# Altium PCB oldman.PcbDoc
Units mil, origin at the board's own origin, x right, y up, seen from the top; angles counter-clockwise.
Board outline 1980.65 x 3160.35 mil, 2 copper layers (Top Layer, Bottom Layer); 19 components, 19 nets, 146 pads, 92 vias.
Unrouted connection lines stored in the file: 1.
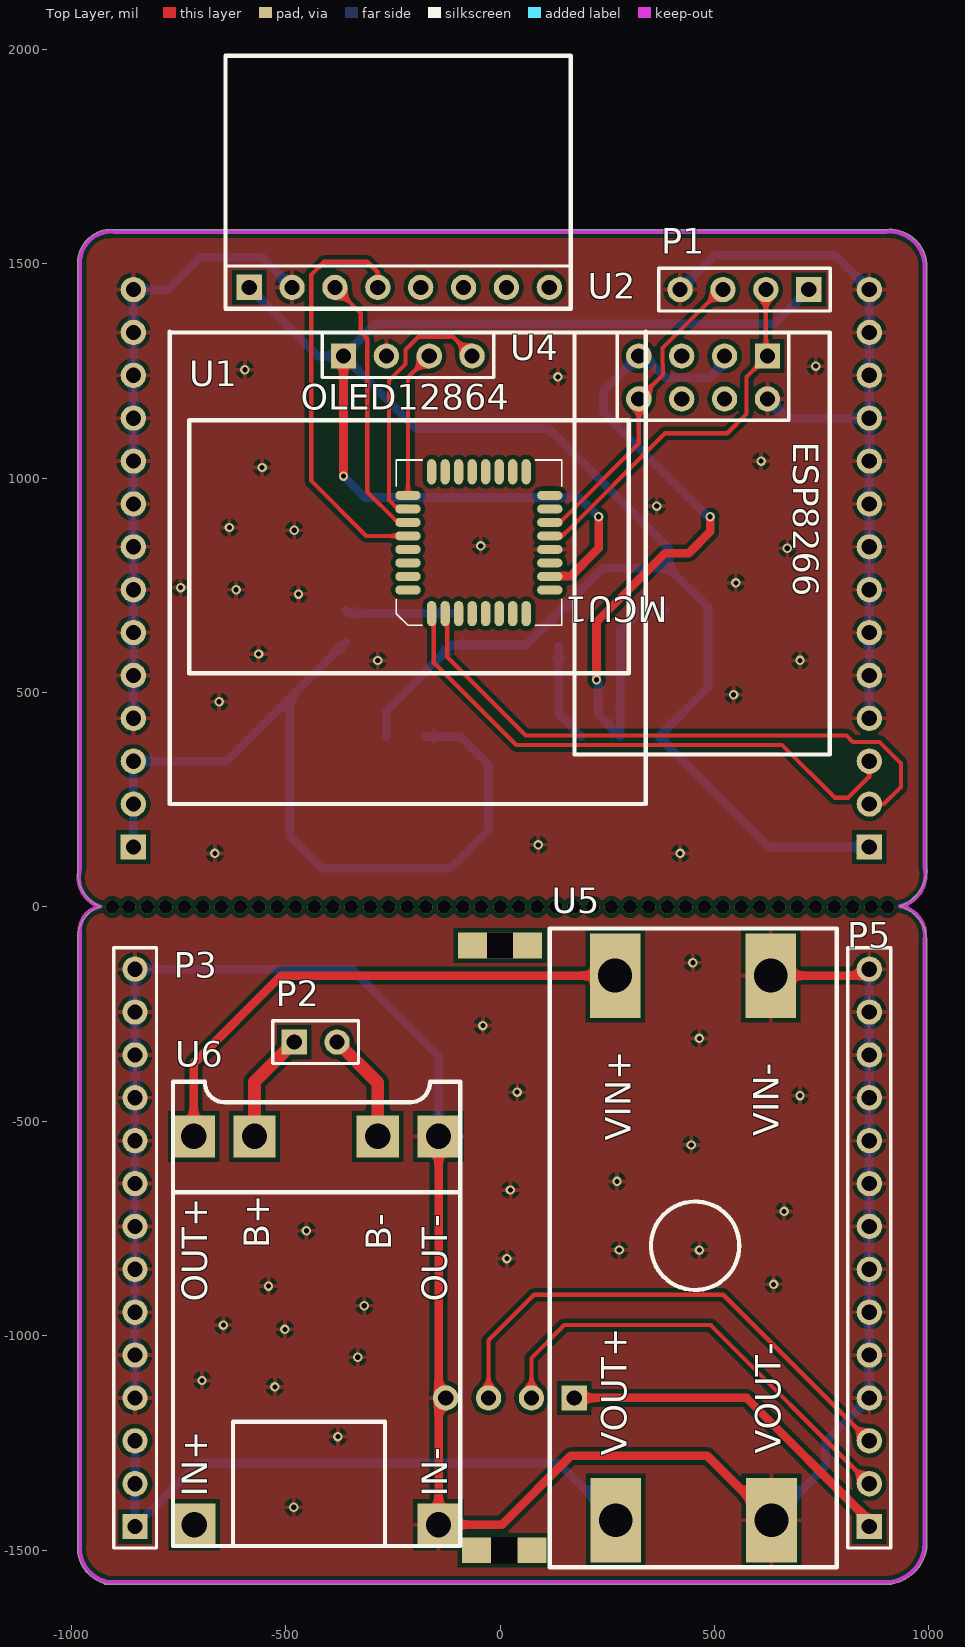
[diagram p0: Top Layer view]
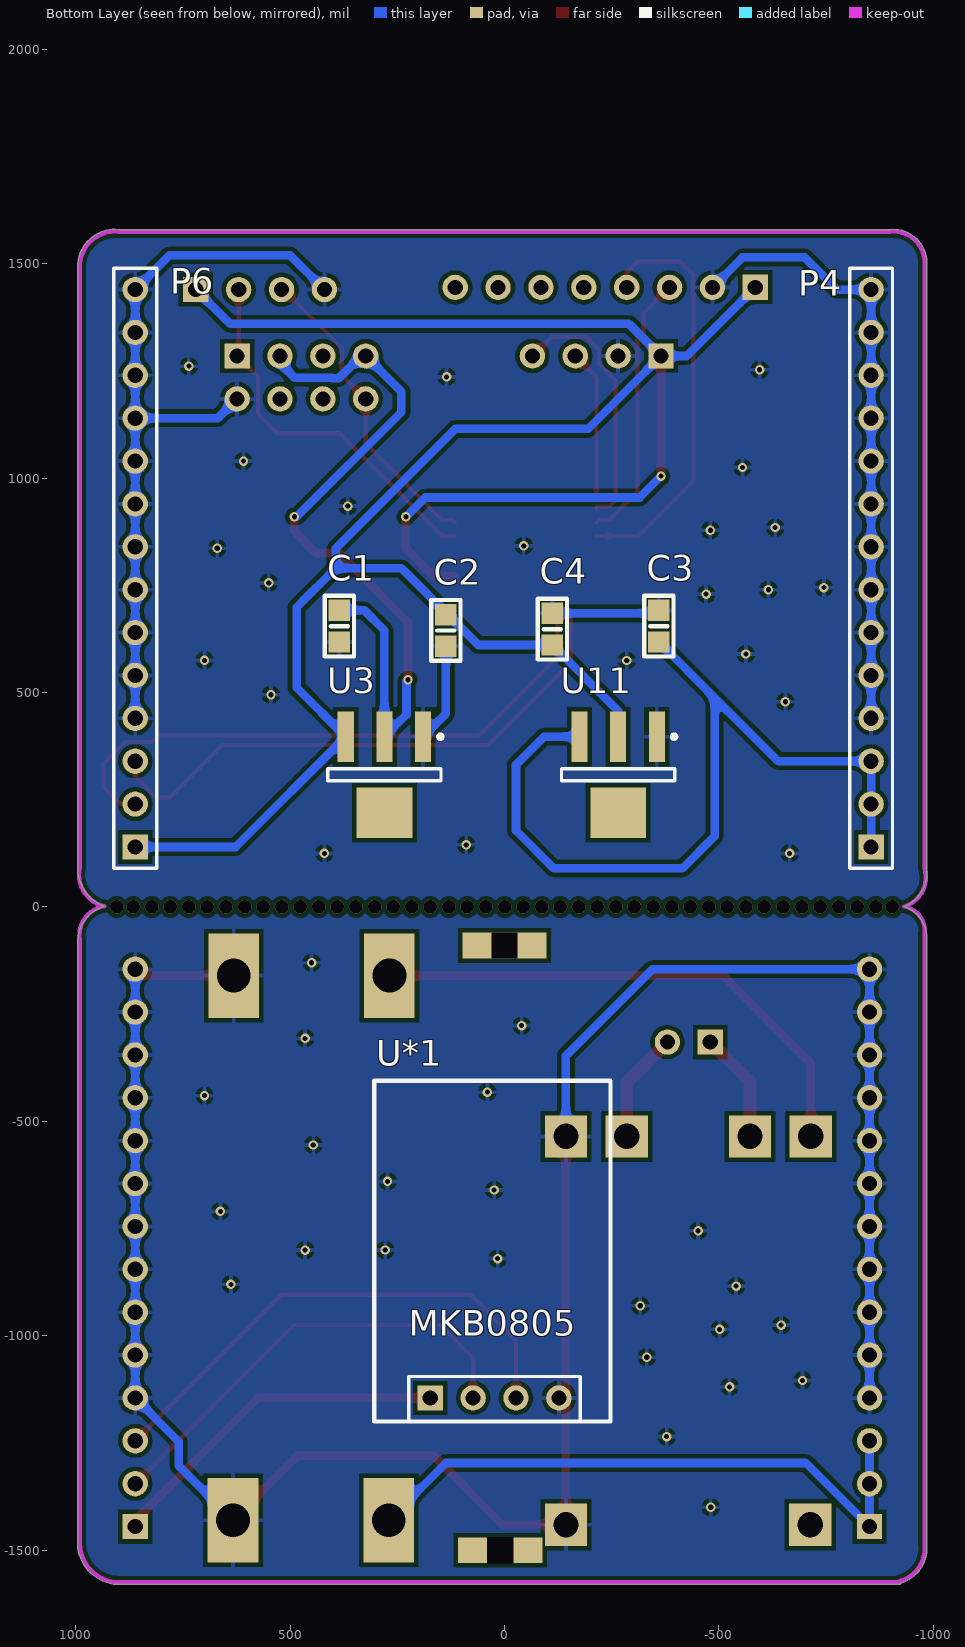
[diagram p1: Bottom Layer view, seen from below]

## Layer stack, top to bottom
Top Solder: solder mask 0.4, Solder Resist, Dk 3.5
Top Layer: signal copper 1.4
Dielectric 1: dielectric 12.6, FR-4, Dk 4.8
Bottom Layer: signal copper 1.4
Bottom Solder: solder mask 0.4, Solder Resist, Dk 3.5

## Board outline
-984.46,-1484.69 ccw(c-899.45,-1495) -924.03,-1577.03 ccw(c-919.45,-1575) -919.45,-1580.01 895.48,-1580.01 ccw(c898.05,-1482.5) 995.56,-1485.14 ccw(c990.55,-1485) 995.57,-1485 ccw(c990.55,-1485) 995.57,-1484.96 995.57,-75.03 ccw(c990.55,-75) 995.57,-75 ccw(c990.55,-75) 995.55,-74.55 ccw(c908.05,-82.5) 933.45,1.6 ccw(c898.05,92.5) 995.56,89.86 ccw(c990.55,90) 995.57,90 ccw(c990.55,90) 995.57,90.04 995.57,1499.97 ccw(c990.55,1500) 995.57,1500 ccw(c990.55,1500) 995.55,1500.45 ccw(c908.05,1492.5) 900.1,1579.99 ccw(c900.55,1575) 899.16,1579.82 -899.19,1579.82 ccw(c-907.05,1502.4) -984.44,1510.52 ccw(c-979.45,1510) -984.46,1510 -984.46,90.31 ccw(c-899.45,80) -932.42,0.96 ccw(c-907.05,-72.6) -984.44,-64.48 ccw(c-979.45,-65) -984.46,-65

## Design rules (kind name [scope] priority, off if disabled: settings)
Clearance [All] p1: gap=10 ignorepadtopadclearanceinfootprint=FALSE except(0: Arc-Hole Track-Hole SMDPad-Hole THPad-Hole Via-Hole Fill-Hole Poly-Hole Region-Hole Text-Hole)
PolygonConnect [All] p1: connectstyle=Relief reliefconductorwidth=10 reliefentries=4 polygonreliefangle="90 Angle" airgapwidth=10
RoomDefinition 手环电路图 [InComponentClass('手环电路图')] p1: confinementstyle=ConfineIn formatcopy=TRUE outline -4239.45,-2305 -2239.45,-2305 -2239.45,-1305 -4239.45,-1305
RoutingVias [All] p1: holewidth=28 width=50 viastyle="Through Hole" minholewidth=28 minwidth=50 maxholewidth=28 maxwidth=50
SolderMaskExpansion [All] p1: expansion=4
Width Power [InNetClass('Power')] p1: maxlimit=30 minlimit=10 preferedwidth=20 minimp=50.000000 maximp=50.000000 favimp=50.000000
Width [All] p2: maxlimit=10 minlimit=10 preferedwidth=10
30 further rules are at their usual default settings.

## Classes and differential pairs
net class Power: GND OUT+ VCC(3.3V) VCC(5V) VCC(5V)_1 VOUT1 VOUT2

## Components (designator, comment, footprint, x,y, rotation, side; value= is the part's Value field where it differs from the comment)
C1 "10uF 25V" SMT_C_0805 385,655 r270 bottom
C2 "10uF 25V" SMT_C_0805 136.67,645 r270 bottom
C3 "10uF 25V" SMT_C_0805 -360,655 r90 bottom
C4 "10uF 25V" SMT_C_0805 -111.67,648 r90 bottom
MCU1 "STC15F2K60S2_QFP32" LQFP32 -159.49,684.29 r90 top
P1 "Header 4" HDR1X4 720,1440 r180 top
P2 "Header 2" HDR1X2 -480,-315 r0 top
P3 "Header_L1" HDR1X14 -851.26,-1445 r90 top
P4 "Header _L2" HDR1X14 -855,140 r90 bottom
P5 "Header_R1" HDR1X14 861.26,-1445 r90 top
P6 "Header_R2" HDR1X14 861.26,140 r90 bottom
U1 "LOED12864" OLED12864 -215,1285 r0 top
U2 "MPU6050" MPU6050 -235,1445 r90 top
U3 "AMS1117-3.3" AMS1117 189.94,397.17 r270 bottom
U4 "ESP8266" ESP8266 473.66,1235 r270 top
U5 "升压板" MT3608 785,-1525 r90 top
U6 "充电模块" HW373 -93.27,-1490.51 r90 top
U11 "AMS1117-5" AMS1117 -355.16,397.17 r270 bottom
U*1 "MKB0805" MKB0805 23.23,-1145 r90 bottom

## Footprints (in the part's own frame and the unit in brackets; to place one, negate y for a bottom-side part, rotate by r counter-clockwise, add the part's x,y. Pads: shape width x height; smd on the part's side, far side on the other; paste and mask are expansions set on the pad)
AMS1117 [mm]
  rect 3x0.95 smd: 1(0,0) 2(0,-2.29) 3(0,-4.58)
  rect 3x3.3 smd: 4(4.5,-2.29)
  silkscreen extent -0.12,-5.65 2.6,1.15, body extent 0.4,-5.65 4.11,1.06, height 1.8
ESP8266 [mm]
  round 1.5 hole 0.9: 1(1.27,3.81) 2(1.27,1.27) 3(1.27,-1.27) 4(1.27,-3.81) 5(-1.27,-3.81) 6(-1.27,-1.27) 7(-1.27,1.27)
  rect 1.5x1.5 hole 0.9: 8(-1.27,3.81)
  silkscreen extent -2.67,-7.62 22.33,7.5
HDR1X2 [mm] "Connector; Header; 2 Position"
  rect 1.5x1.5 hole 0.9: 1(0,0)
  round 1.5 hole 0.9: 2(2.54,0)
  silkscreen extent -1.27,-1.27 3.81,1.27
HDR1X4 [mm] "Connector; Header; 4 Position"
  rect 1.5x1.5 hole 0.9: 1(0,0)
  round 1.5 hole 0.9: 2(2.54,0) 3(5.08,0) 4(7.62,0)
  silkscreen extent -1.27,-1.27 8.89,1.27
HDR1X14 [mm] "Connector; Header; 14 Position"
  rect 1.5x1.5 hole 0.9: 1(0,0)
  round 1.5 hole 0.9: 2(2.54,0) 3(5.08,0) 4(7.62,0) 5(10.16,0) 6(12.7,0) 7(15.24,0) 8(17.78,0) 9(20.32,0) 10(22.86,0) 11(25.4,0) 12(27.94,0) 13(30.48,0) 14(33.02,0)
  silkscreen extent -1.27,-1.27 34.29,1.27
HW373 [mm] "升压板模块"
  rect 2.5x2.5 hole 1.5: 1(1.27,15.748) 2(1.27,1.27) 3(24.27,15.778) 4(24.27,12.178) 5(24.27,4.87) 6(24.27,1.27)
  silkscreen extent 0,-0.02 27.5,17
LQFP32 [mm]
  oval 1.5x0.55 smd: 1(0,0) 2(0,-0.8) 3(0,-1.6) 4(0,-2.4) 5(0,-3.2) 6(0,-4) 7(0,-4.8) 8(0,-5.6) 17(8.4,-5.6) 18(8.4,-4.8) 19(8.4,-4) 20(8.4,-3.2) 21(8.4,-2.4) 22(8.4,-1.6) 23(8.4,-0.8) 24(8.4,0)
  oval 0.55x1.5 smd: 9(1.4,-7) 10(2.2,-7) 11(3,-7) 12(3.8,-7) 13(4.6,-7) 14(5.4,-7) 15(6.2,-7) 16(7,-7) 25(7,1.4) 26(6.2,1.4) 27(5.4,1.4) 28(4.6,1.4) 29(3.8,1.4) 30(3,1.4) 31(2.2,1.4) 32(1.4,1.4)
  silkscreen extent -0.7,-7.7 9.1,2.1
MKB0805 [mm]
  rect 1.5x1.5 hole 0.9: 1(0,3.81)
  round 1.5 hole 0.9: 2(0,1.27) 3(0,-1.27) 4(0,-3.81)
  silkscreen extent -1.4,-6.87 18.8,7.13
MPU6050 [mm]
  rect 1.5x1.5 hole 0.9: 1(0,8.89)
  round 1.5 hole 0.9: 2(0,6.35) 3(0,3.81) 4(0,1.27) 5(0,-1.27) 6(0,-3.81) 7(0,-6.35) 8(0,-8.89)
  silkscreen extent -1.27,-10.16 13.73,10.29
MT3608 [mm] "升压板模块封装"
  rect 5x3 hole 2: 1(2.413,13.081) 2(2.413,3.857) 3(34.671,13.121) 4(34.671,3.897)
  silkscreen extent -0.38,0 37.46,17
OLED12864 [mm]
  rect 1.5x1.5 hole 0.9: 1(-3.81,0)
  round 1.5 hole 0.9: 2(-1.27,0) 3(1.27,0) 4(3.81,0)
  silkscreen extent -14.1,-26.54 14.1,1.46
SMT_C_0805 [mil]
  rect 50x50 smd: 1(-37,0) 2(37,0)
  silkscreen extent -71,-34 71,34, body extent -49,-24 49,25, height 31

## Part data
C1 C2 C3 C4: library part SMT_C_0805, "Surface mount capacitor 0805"
P1: "Header, 4-Pin", LatestRevisionDate=17-Jul-2002, LatestRevisionNote="Re-released for DXP Platform.", Publisher="Altium Limited"
P2: "Header, 2-Pin", LatestRevisionDate=17-Jul-2002, LatestRevisionNote="Re-released for DXP Platform.", Publisher="Altium Limited"
P3 P4 P5 P6: library part "Header 14", "Header, 14-Pin", LatestRevisionDate=17-Jul-2002, LatestRevisionNote="Re-released for DXP Platform.", Publisher="Altium Limited"
U5: library part MT3608
U6: library part HW373
U11: library part AMS1117-3.3

## Free pads (board coordinates)
  rect 196.85x60 hole 60 square: 8(0,-90) 8(10,-1500)

## Via types
v1: diameter 22, hole 12, Top Layer to Bottom Layer, tented both sides, 49 vias
v2: diameter 31.5, hole 31.5, Top Layer to Bottom Layer, tented both sides, 43 vias

## Nets (pads, with @x,y where several pads share a name; then routed paths per layer and width w, separated by ;. In a path a pad name is that pad's centre, name@x,y a point inside that pad or via, vN(x,y) a via of type N, cw(c..) or ccw(c..) an arc to the next point about the centre after c; other vN are vias at no path point)
GND: C1.2 C2.2 C3.2 C4.2 MCU1.12 P1.4 P3.4 P3.5 P3.6 P3.7 P3.8 P3.9 P3.10 P3.11 P3.12 P3.13 P3.14 P4.4 P4.5 P4.6 P4.7 P4.8 P4.9 P4.10 P4.11 P4.12 P4.13 P4.14 P5.4 P5.5 P5.6 P5.7 P5.8 P5.9 P5.10 P5.11 P5.12 P5.13 P5.14 P6.4 P6.5 P6.6 P6.7 P6.8 P6.9 P6.10 P6.11 P6.12 P6.13 P6.14 U1.2 U2.2 U3.1 U4.1 U5.2 U5.4 U6.2 U6.6 U11.1 U*1.4 | length 9097.4
  Top Layer w20: U6.6 -143.27,-1128.5 U*1.4 -143.27,-1161.5 U6.2 4.49,-1440.51 165,-1280 483.15,-1280 U5.2 ; U5.4 846.26,-160 P5.14
  Bottom Layer w20: P4.4 P4.5 P4.6 P4.7 P4.8 P4.9 P4.10 P4.11 P4.12 P4.13 P4.14 -775,1440 -700,1515 -555,1515 U2.2 ; P3.4 P3.5 P3.6 P3.7 P3.8 P3.9 P3.10 P3.11 P3.12 P3.13 P3.14 -345,-145 -143.27,-346.73 U6.6 ; C3.2 -353,685 C4.2 ; C2.2 136.67,450.44 U3.1 ; P1.4 500,1520 781.26,1520 P6.14 P6.13 P6.12 P6.11 ; U4.1 668.66,1140 P6.11 ; U5.2 760,-1303.15 760,-1246.26 P5.4 P5.5 P5.6 P5.7 P5.8 P5.9 P5.10 P5.11 P5.12 P5.13 P5.14 ; P6.4 P6.5 P6.6 P6.7 P6.8 P6.9 P6.10 P6.11
  other v1: -481.14,-1400 -378.15,-1235 -525,-1119.37 -695,-1104.23 -331.76,-1050 -501.55,-985 -645,-975 -316.62,-930 -540,-884.21 638.15,-880 15.96,-820 278.21,-800 465,-800.22 -451.43,-755 662.59,-710 24.15,-660 272.83,-640 446.06,-555 699.64,-440 40,-431.81 465,-306.49 -40,-276.49 449.86,-130 -665,125 420,125 89.28,145 -655.24,478.51 544.63,495 -285,574.86 699.64,575 -562.99,590 -470,729.68 -615.42,740 -745,745 550,755.89 670,836.65 -45,842.02 -480,878.51 -631.24,885 365.61,935 -555,1025 608.78,1040 135,1236.34 -595,1253.11 736.22,1261.34
NetP2_1: P2.1 U6.4 | length 258.4
  Top Layer w30: U6.4 -572.72,-407.72 P2.1
NetP2_2: P2.2 U6.5 | length 259.4
  Top Layer w30: P2.2 -285,-410 U6.5
OUT+: U5.3 U6.3 | length 1238.1
  Top Layer w20: U6.3 -714.45,-364.45 -510,-160 U5.3
P2.4: MCU1.25 U1.3 | length 345.7
  Top Layer w10: MCU1.25 -214.61,1235.39 U1.3
P2.5: MCU1.26 U1.4 | length 609.6
  Top Layer w10: MCU1.26 -214.61,934.06 -244,934.06 -259.13,949.18 -259.13,1227.89 -220.47,1266.56 -220.47,1299.53 -190,1330 -110,1330 U1.4
P2.6: MCU1.27 U2.3 | length 632.6
  Top Layer w10: U2.3 -325,1385 -325,1340.74 -309.53,1325.27 -309.53,968.08 -244,902.56 -220.28,902.56 MCU1.27
P2.7: MCU1.28 U2.4 | length 972.9
  Top Layer w10: U2.4 -285,1480.47 -309.53,1505 -410,1505 -440,1475 -440,993.62 -311.77,865.39 MCU1.28
RXD: MCU1.13 P1.2 U4.8 | length 888.5
  Top Layer w10: MCU1.13 145.39,865.39 385,1105 530,1105 575,1150 575,1236.34 U4.8 620,1288.66 P1.2
RXD2_1: P5.2 U*1.2 | length 1066.3
  Top Layer w10: U*1.2 73.23,-1051.77 150,-975 491.26,-975 P5.2
RXD2_2: MCU1.2 P6.2 | length 1409.4
  Top Layer w10: MCU1.2 -122.99,679.29 -122.99,582.99 60,400 807.83,400 822.83,385 885,385 935,335 935,280 895,240 P6.2
TXD: MCU1.14 P1.3 U4.4 | length 727.6
  Top Layer w10: MCU1.14 121.77,902.56 145.5,902.56 323.66,1080.72 U4.4 380,1241.34 380,1264.82 379.13,1265.69 379.13,1303.44 515.69,1440 P1.3
TXD2_1: P5.3 U*1.3 | length 1207.7
  Top Layer w10: U*1.3 -26.77,-1010.35 79.29,-904.29 520.55,-904.29 P5.3
TXD2_2: MCU1.1 P6.3 | length 1318.9
  Top Layer w10: MCU1.1 -154.49,679.29 -154.49,569.95 37.73,377.73 657.73,377.73 780.46,255 812.27,255 861.26,303.99 P6.3
VCC(3.3V): C1.1 U3.2 U4.5 U4.7 | length 1818.2
  Top Layer w20: v1(225,530) 225,665 385,825 440,825 490,875 v1(490,910)
  Bottom Layer w20: v1(225,530) 228.65,526.35 228.65,448.62 U3.2 280.1,645.1 327,692 C1.1 ; v1(490,910) 485,910 240.38,1154.62 240.38,1201.72 U4.5 335,1285 386.81,1233.19 401.81,1233.19 403.15,1234.53 489.53,1234.53 523.66,1268.66 U4.7
VCC(5V): C2.1 C4.1 MCU1.10 P1.1 P6.1 U1.1 U2.1 U3.3 U11.2 | length 5487.8
  Top Layer w20: v1(-365,1004.84) U1.1 ; MCU1.10 116.77,771.57 164.93,771.57 230,836.65 v1(230,910)
  Bottom Layer w20: U2.1 -425,1285 U1.1 ; v1(-365,1004.84) -315.16,955 185,955 v1(230,910) ; U11.2 -265,457.67 C4.1 61.38,611 240.38,790 393.66,790 ; P1.1 640,1360 -290,1360 U1.1 ; P6.1 627.43,140 U3.3 485,511.91 485,698.66 462.17,721.5 416.5,767.17 393.66,790 ; U1.1 -195,1115 115,1115 393.66,836.34 393.66,790
VCC(5V)_1: P5.1 U*1.1 | length 820.3
  Top Layer w20: U*1.1 575,-1145 861.26,-1431.26 P5.1
VOUT1: P3.1 P3.2 P3.3 U5.1 | length 1437.9
  Bottom Layer w20: P3.3 P3.2 P3.1 -702.93,-1296.67 136.67,-1296.67 U5.1
VOUT2: C3.1 P4.1 P4.2 P4.3 U11.3 | length 1992.7
  Bottom Layer w20: P4.1 P4.2 P4.3 -638,340 -490,488 ; C3.1 -490,488 ; U11.3 -92.17,397.17 -26.77,331.77 -26.77,178.23 -115,90 -415,90 -490,165 -490,488
pads on no net: MCU1.3 MCU1.4 MCU1.5 MCU1.6 MCU1.7 MCU1.8 MCU1.9 MCU1.11 MCU1.15 MCU1.16 MCU1.17 MCU1.18 MCU1.19 MCU1.20 MCU1.21 MCU1.22 MCU1.23 MCU1.24 MCU1.29 MCU1.30 MCU1.31 MCU1.32 U2.5 U2.6 U2.7 U2.8 U3.4 U4.2 U4.3 U4.6 U6.1 U11.4
copper on no net:
  other v2: -904.45,0 -866.14,0 -822.83,0 -779.53,0 -736.22,0 -692.91,0 -649.61,0 -606.3,0 -562.99,0 -519.69,0 -476.38,0 -433.07,0 -389.76,0 -346.46,0 -303.15,0 -259.84,0 -216.54,0 -173.23,0 -129.92,0 -86.61,0 -43.31,0 0,0 43.31,0 86.61,0 129.92,0 173.23,0 216.54,0 259.84,0 303.15,0 346.46,0 389.76,0 433.07,0 476.38,0 519.69,0 562.99,0 606.3,0 649.61,0 692.91,0 736.22,0 779.53,0 822.83,0 866.14,0 904.45,0

## Polygon pours and split planes (outlines as drawn)
GND on Top Layer "GND_L01_P000" (solid, remove dead copper, pour order 0): -984.46,-1484.69 ccw(c-899.45,-1495) -924.03,-1577.03 ccw(c-919.45,-1575) -919.45,-1580.01 895.48,-1580.01 ccw(c898.05,-1482.5) 995.56,-1485.14 ccw(c990.55,-1485) 995.57,-1485 ccw(c990.55,-1485) 995.57,-1484.96 995.57,-75.03 ccw(c990.55,-75) 995.57,-75 ccw(c990.55,-75) 995.55,-74.55 ccw(c908.05,-82.5) 933.45,1.6 ccw(c898.05,92.5) 995.56,89.86 ccw(c990.55,90) 995.57,90 ccw(c990.55,90) 995.57,90.04 995.57,1499.97 ccw(c990.55,1500) 995.57,1500 ccw(c990.55,1500) 995.55,1500.45 ccw(c908.05,1492.5) 900.1,1579.99 ccw(c900.55,1575) 899.16,1579.82 -899.19,1579.82 ccw(c-907.05,1502.4) -984.44,1510.52 ccw(c-979.45,1510) -984.46,1510 -984.46,90.31 ccw(c-899.45,80) -932.42,0.96 ccw(c-907.05,-72.6) -984.44,-64.48 ccw(c-979.45,-65) -984.46,-65
GND on Bottom Layer "GND_L02_P001" (solid, remove dead copper, pour order 1): -984.46,-1484.69 ccw(c-899.45,-1495) -924.03,-1577.03 ccw(c-919.45,-1575) -919.45,-1580.01 895.48,-1580.01 ccw(c898.05,-1482.5) 995.56,-1485.14 ccw(c990.55,-1485) 995.57,-1485 ccw(c990.55,-1485) 995.57,-1484.96 995.57,-75.03 ccw(c990.55,-75) 995.57,-75 ccw(c990.55,-75) 995.55,-74.55 ccw(c908.05,-82.5) 933.45,1.6 ccw(c898.05,92.5) 995.56,89.86 ccw(c990.55,90) 995.57,90 ccw(c990.55,90) 995.57,90.04 995.57,1499.97 ccw(c990.55,1500) 995.57,1500 ccw(c990.55,1500) 995.55,1500.45 ccw(c908.05,1492.5) 900.1,1579.99 ccw(c900.55,1575) 899.16,1579.82 -899.19,1579.82 ccw(c-907.05,1502.4) -984.44,1510.52 ccw(c-979.45,1510) -984.46,1510 -984.46,90.31 ccw(c-899.45,80) -932.42,0.96 ccw(c-907.05,-72.6) -984.44,-64.48 ccw(c-979.45,-65) -984.46,-65

## Keep-outs
Keep-Out Layer:
  lines w10: -919.45,-1575 895.55,-1575 ccw(c898.05,-1482.5) 990.55,-1485 990.55,-75 ccw(c923.7,-65.25) 933.45,1.6 ccw(c916.54,75.61) 990.55,92.53 990.55,1500 ccw(c908.05,1492.5) 900.55,1575 ; -909.45,-1575 cw(c-899.45,-1495) -979.45,-1485 -979.45,-65 cw(c-922.95,-55.53) -932.42,0.96 cw(c-911.42,69) -979.45,90 -979.45,1510 cw(c-907.05,1502.4) -899.45,1574.8 900.55,1574.8

## Dimensions
-979.45,-1485 to 990.55,-1485 on Top Overlay
-919.45,-1575 to -899.45,1574.8 on Top Overlay

## Text inside footprints (layer, text, board x,y; h text height)
U1: Top Overlay "OLED12864" at -465,1160 h60
U5: Top Overlay "VIN-" at 650,-535 h60 r90; Top Overlay "VIN+" at 305,-545 h60 r90; Top Overlay "VOUT-" at 655,-1275 h60 r90; Top Overlay "VOUT+" at 295,-1280 h60 r90
U6: Top Overlay "IN+" at -683.27,-1375.51 h60 r90; Top Overlay "IN-" at -123.27,-1375.51 h60 r90; Top Overlay "OUT+" at -683.27,-920.51 h60 r90; Top Overlay "B+" at -538.27,-795.51 h60 r90; Top Overlay "B-" at -253.27,-800.51 h60 r90; Top Overlay "OUT-" at -123.27,-920.51 h60 r90